# EAGLE board 484 1.1 (EAGLE 7.6.0)
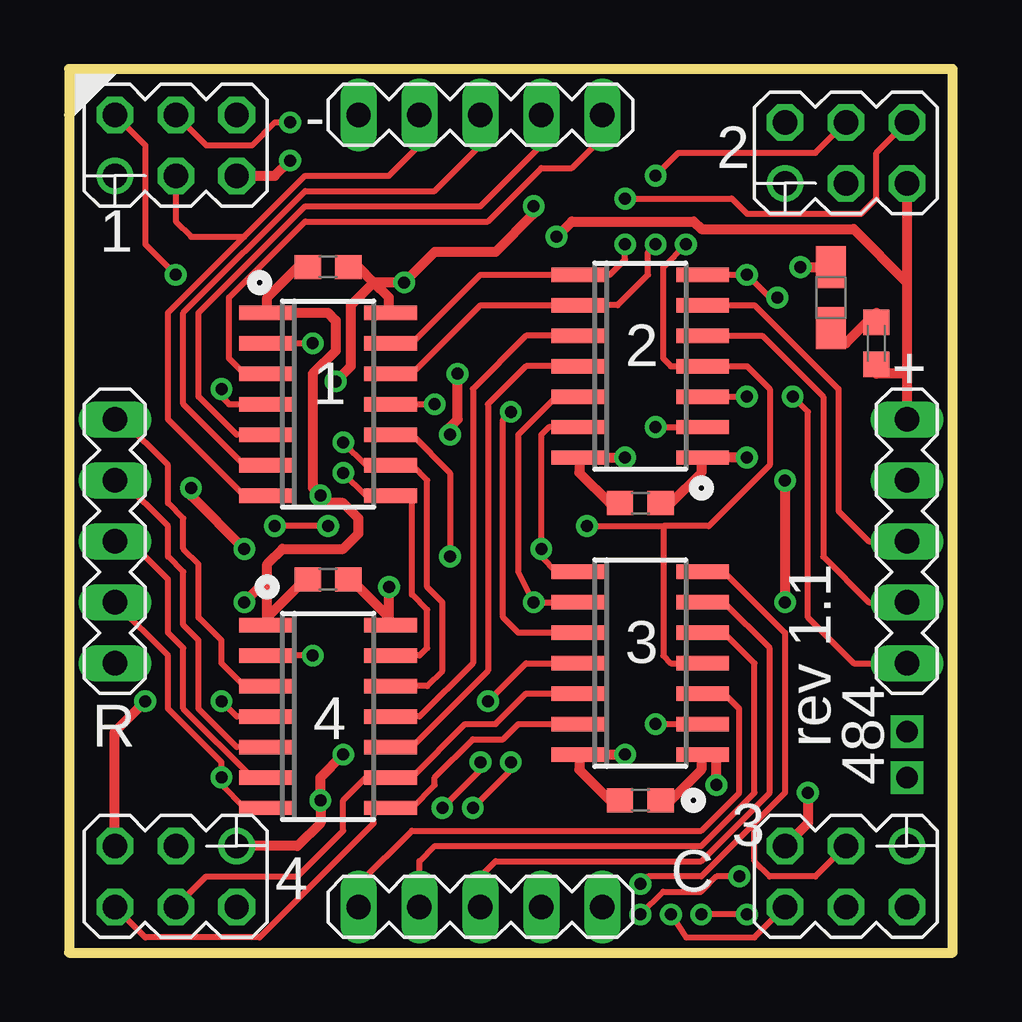
[diagram p0: board, top side]
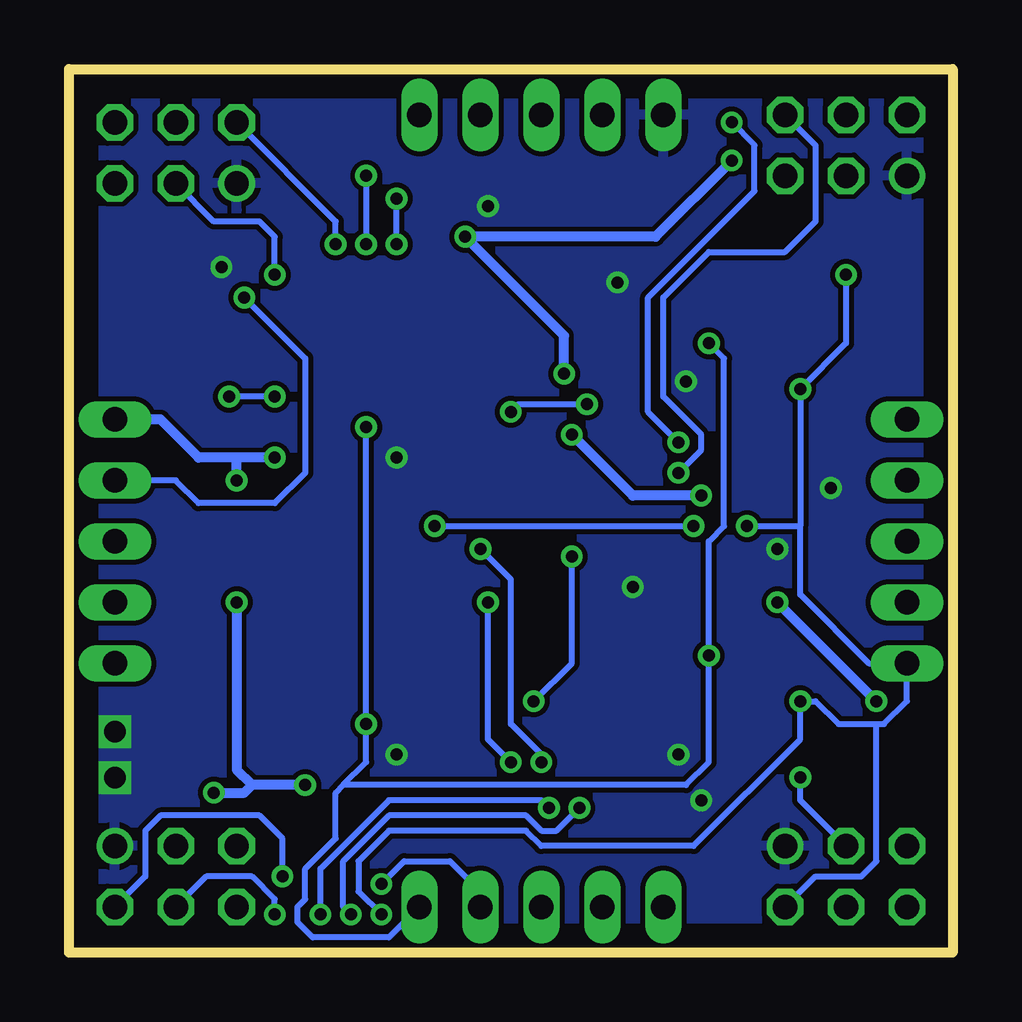
[diagram p1: board, bottom side, seen from below]

Size 36.83 x 36.83 mm. Coordinates in mm from the lower left corner, seen from the top.
Outline: 0,0 36.83,0 36.83,36.83 0,36.83 0,0
Copper layers (1*16): Top 0.035mm / dielectric 1.5mm / Bottom 0.035mm
Design rules "default": minimum track width 10mil, minimum drill 24mil, track to track 8mil, track to pad 8mil, pad to pad 8mil, via to via 8mil, smd to smd 8mil, copper to edge 40mil, drill to drill 8mil, minimum pad ring 10mil, minimum via ring 8mil, stop-mask expansion 4mil, vias tented up to drill 0mil, thermal gap 10mil

## Footprints (pad centres in the part's own frame; a part is rotated, then mirrored left to right if it is on the bottom)
SO14 = smd 0.6 x 2.2: 1 -3.81,-2.6; 2 -2.54,-2.6; 3 -1.27,-2.6; 4 0,-2.6; 5 1.27,-2.6; 6 2.54,-2.6; 7 3.81,-2.6; 8 3.81,2.6; 9 2.54,2.6; 10 1.27,2.6; 11 0,2.6; 12 -1.27,2.6; 13 -2.54,2.6; 14 -3.81,2.6
MA05-1 = drill 1.016 long: 2 -2.54,0; 3 0,0; 4 2.54,0; 5 5.08,0; GND -5.08,0
MA03-2 = drill 1.016 octagon: 2 -2.54,1.27; 3 0,-1.27; 4 0,1.27; 5 2.54,-1.27; 6 2.54,1.27 | drill 1.016: GND -2.54,-1.27
C1608 = smd 1.1 x 1: 1 -0.85,0; 2 0.85,0
C0603K = smd 1.05 x 1.08: 1 -0.875,0; 2 0.875,0
R/2012-12W = smd 1.75 x 1.26: + 1.275,0; - -1.275,0

## Placement (x,y rotation side)
E$1  [SO14]  10.8,22.86 270 top
E$2  [SO14]  23.81,24.45 270 top
E$3  [SO14]  10.8,9.84 270 top
E$4  [SO14]  23.81,12.07 270 top
E$6  [MA05-1]  17.14,1.91 0 top
E$7  [MA03-2]  32.39,33.34 0 top
E$8  [MA05-1]  17.14,34.92 180 top
E$9  [MA05-1]  34.92,17.14 270 top
E$10  [C1608]  10.8,15.56 0 top
E$11  [C1608]  10.8,28.57 0 top
E$12  [C1608]  23.81,18.73 0 top
E$13  [C1608]  23.81,6.35 0 top
E$14  [MA03-2]  4.45,3.18 180 top
E$15  [MA03-2]  32.39,3.18 180 top
E$17  [MA03-2]  4.45,33.66 0 top
E$18  [C0603K]  33.66,25.4 90 top
E$19  [R/2012-12W]  31.75,27.31 90 top
E$20  [MA05-1]  1.91,17.14 90 top

## Library data of the parts
E$1-E$4 = analog-devices
E$6-E$9 E$14 E$15 E$17 E$20 = con-lstb
E$10-E$13 = eagle-ltspice
E$18 E$19 = resistor

## Nets
GND: E$7.GND E$8.5 E$14.GND E$15.GND E$17.GND
S$2: E$14.6
S$3: E$9.4
S$8: E$8.4 E$17.3
S$15: E$14.2
S$16: E$17.4
S$17: E$9.GND E$14.5 E$15.5 E$17.5
S$19: E$17.6
S$20: E$9.3
S$23: E$6.GND
S$25: E$15.2 E$17.2 E$20.GND
S$26: E$7.6
S$27: E$6.3
S$29: E$14.4
S$30: E$8.GND
S$31: E$8.2
S$32: E$8.3
S$33: E$15.4
S$34: E$9.5
S$35: E$20.5
S$36: E$15.6
S$37: E$20.4
S$38: E$20.3
S$39: E$6.4 E$15.3
S$40: E$7.3 E$9.2
S$41: E$14.3 E$20.2
S$42: E$6.5
S$43: E$6.2
S$46: E$7.2

## Tracks (layer width: path | path; a pad name or v marks a point on that pad's centre or on a via)
GND  (via drill 0.5, 0.9)
  Top 0.406: v30.48,28.57 31.75,28.57 | 21.91,20.64 v23.18,20.64 | 21.91,8.25 v23.18,8.25 | v11.11,23.81 11.75,24.45 11.75,26.99 12.7,27.94 | 13.34,26.67 13.34,27.31 12.7,27.94 | 12.7,27.94 12.06,28.57 | 12.7,27.94 v13.97,27.94 15.24,29.21 17.78,29.21 19.37,30.8 v19.37,31.11 | v5.08,19.37 5.08,19.05 v7.3,16.83 | v11.43,8.25 10.48,7.3 v10.48,6.35 10.48,5.4 9.52,4.45 E$14.GND | 13.34,13.65 13.34,13.97 | 13.34,13.97 12.06,15.24 | 13.34,13.97 v13.34,15.24
  other vias: 34.92,9.21 34.92,7.3
  pour Bottom: 0,0 36.83,0 36.83,36.83 0,36.83
S$1
  Top 0.254: 13.97,12.38 14.6,12.38 14.92,12.7 14.92,14.29 14.29,14.92 14.29,19.05
S$2
  Top 0.254: 12.7,5.71 12.7,5.4 7.94,0.64 3.17,0.64 E$14.6
S$3
  Top 0.254: 26.99,25.72 28.89,25.72 31.43,23.18 31.43,16.51 33.34,14.61 E$9.4
S$4  (via drill 0.5)
  Top 0.254: 20.32,13.33 18.73,13.33 18.1,13.97 18.1,22.22 v18.41,22.54 | 13.97,22.86 v15.24,22.86
  Bottom 0.254: v18.41,22.54 18.1,22.86 v15.24,22.86
S$5
  Top 0.406: 21.27,20.64 21.27,20 22.54,18.73
S$6
  Top 0.406: 26.35,20.64 26.35,20 25.08,18.73
S$7
  Top 0.406: 26.35,8.25 26.35,7.62 25.08,6.35
S$8
  Top 0.254: E$17.3 4.45,30.48 5.08,29.85 7.3,29.85 | 7.62,19.05 7.3,19.05 4.13,22.22 4.13,26.67 7.3,29.85 | 7.3,29.85 9.84,32.39 13.34,32.39 14.6,33.66 E$8.4
S$9
  Top 0.254: 20.32,28.26 17.14,28.26 14.29,25.4 13.97,25.4
S$10
  Top 0.254: 14.29,24.13 17.14,26.99 20.32,26.99
S$11
  Top 0.254: 14.29,7.3 16.51,9.53 17.78,9.53 19.05,10.79 20.32,10.79
S$12
  Top 0.254: 14.29,6.03 15.24,6.99 15.24,7.3 16.83,8.89 18.1,8.89 18.73,9.53 20.32,9.53
S$13
  Top 0.254: 20.32,24.45 19.05,24.45 17.46,22.86 17.46,11.75 14.29,8.57 13.97,8.57
S$14
  Top 0.254: 20.32,25.72 19.05,25.72 16.83,23.5 16.83,12.07 14.6,9.84 13.97,9.84
S$15
  Bottom 0.254: E$14.2 5.71,3.18 3.81,3.18 3.17,3.81 3.17,9.53
S$16  (via drill 0.5)
  Top 0.254: E$17.4 5.71,33.66 7.62,33.66 8.57,34.61 v9.21,34.61 | 12.38,20.32 v11.43,21.27
  Bottom 0.254: v11.43,21.27 12.7,22.54 12.7,27.31 8.25,31.75 8.25,33.66 v9.21,34.61
S$17  (via drill 0.5)
  Top 0.406: v30.8,6.67 30.8,5.4 E$15.5 | E$14.5 1.91,9.21 v3.17,10.48 | 8.25,13.65 8.25,13.97 | 8.25,13.97 9.52,15.24 | 8.25,13.97 8.25,15.56 | 8.25,15.56 8.25,16.19 8.89,16.83 11.43,16.83 12.06,17.46 12.06,18.1 11.43,18.73 10.8,18.73 v10.48,19.05 10.16,19.37 10.16,24.13 11.11,25.08 11.11,26.35 10.8,26.67 9.21,26.67 | v7.3,14.61 8.25,15.56 | v15.88,21.59 15.88,21.91 16.19,22.22 v16.19,24.13 | v20.32,29.85 20.95,30.48 26.03,30.48 26.35,30.16 32.7,30.16 34.92,27.94 | 34.92,32.07 34.92,27.94 | 34.92,27.94 34.92,24.13 | 34.92,24.13 33.66,24.13 | 34.92,24.13 E$9.GND | v28.26,20.64 26.99,20.64 | v29.84,19.68 v29.84,14.61 | v26.99,6.99 26.99,8.25 | E$17.5 8.57,32.39 v9.21,33.02
  Bottom 0.406: v3.17,10.48 v7.3,14.61 | v10.48,19.05 13.34,19.05 v15.88,21.59 | v9.21,33.02 12.38,29.85 v20.32,29.85 16.19,25.72 v16.19,24.13 | E$9.GND 33.02,22.22 31.43,20.64 29.84,20.64 | v28.26,20.64 29.84,20.64 | v29.84,19.68 29.84,20.64 | v29.84,14.61 29.84,7.62 29.21,6.99 | v26.99,6.99 29.21,6.99 | v30.8,6.67 29.53,6.67 29.21,6.99
S$18
  Top 0.254: 13.97,11.11 14.92,11.11 15.56,11.75 15.56,14.61 14.92,15.24 14.92,19.68 14.29,20.32 13.97,20.32
S$19  (via drill 0.5)
  Top 0.254: 12.38,19.05 v11.43,20
  Bottom 0.254: v11.43,20 10.48,20.96 10.48,21.59 12.06,23.18 12.06,27.31 10.16,29.21 6.98,29.21 5.71,30.48 5.71,33.66 E$17.6
S$20
  Top 0.254: 26.99,26.99 28.57,26.99 32.07,23.5 32.07,18.42 33.34,17.14 E$9.3
S$21  (via drill 0.5)
  Top 0.254: 20.32,12.07 19.05,12.07 v17.46,10.48 | 13.97,21.59 14.29,21.59 15.88,20 v15.88,16.51
  Bottom 0.254: v17.46,10.48 15.88,12.07 v15.88,16.51
S$22
  Top 0.406: 33.66,26.67 32.39,25.4 31.75,25.4
S$23
  Top 0.254: 26.99,10.79 27.3,10.79 27.94,10.16 27.94,6.67 26.35,5.08 14.29,5.08 12.06,2.86 E$6.GND
S$24
  Top 0.406: 21.27,8.25 21.27,7.62 22.54,6.35
S$25  (via drill 0.5)
  Top 0.254: E$17.2 3.17,33.66 3.17,29.53 v4.45,28.26 | v27.94,3.18 26.99,3.18 26.35,2.54 24.77,2.54 v23.81,1.59 | 7.3,9.84 6.98,9.84 v6.35,10.48 | 26.99,24.45 28.26,24.45 29.21,23.5 29.21,20.32 26.67,17.78 24.77,17.78 | 25.72,12.07 25.08,12.07 24.77,12.38 24.77,17.78 | v21.59,17.78 24.77,17.78 | v10.8,17.78 v8.57,17.78 | v6.35,23.5 6.35,23.18 6.67,22.86 7.3,22.86
  Bottom 0.254: E$15.2 33.66,3.18 33.66,5.08 33.02,5.71 28.89,5.71 27.94,4.76 v27.94,3.18 | v23.81,1.59 24.77,2.54 24.77,3.81 23.49,5.08 17.78,5.08 17.14,4.45 10.8,4.45 6.35,8.89 v6.35,10.48 5.71,10.48 4.76,9.53 2.86,9.53 1.91,10.48 E$20.GND 3.49,12.07 6.35,14.92 6.35,17.78 | v21.59,17.78 v10.8,17.78 | 6.35,17.78 v6.35,23.5 4.45,25.4 v4.45,28.26 | v8.57,17.78 6.35,17.78
S$26  (via drill 0.5)
  Top 0.254: 22.23,28.26 22.54,28.26 23.18,28.89 v23.18,29.53 | v23.18,31.43 27.62,31.43 28.26,30.8 33.02,30.8 33.66,31.43 33.66,33.34 E$7.6
  Bottom 0.254: v23.18,29.53 v23.18,31.43
S$27
  Top 0.254: E$6.3 17.14,3.18 17.78,3.81 26.35,3.81 29.21,6.67 29.21,12.7 27.3,14.61 26.99,14.61
S$29
  Top 0.254: E$14.4 5.71,3.18 9.52,3.18 11.43,5.08 11.43,6.35 12.38,7.3
S$30
  Top 0.254: 7.3,24.13 6.67,24.77 6.67,27.31 9.84,30.48 17.46,30.48 19.69,32.7 20.95,32.7 22.23,33.97 E$8.GND
S$31
  Top 0.254: 7.62,21.59 6.98,21.59 5.4,23.18 5.4,26.67 9.84,31.11 17.14,31.11 19.69,33.66 E$8.2
S$32
  Top 0.254: 7.62,20.32 7.3,20.32 4.76,22.86 4.76,26.67 9.84,31.75 15.24,31.75 17.14,33.66 E$8.3
S$33  (via drill 0.5)
  Top 0.254: v28.26,1.59 v26.35,1.59 | 20.32,23.18 18.73,21.59 18.73,15.88 v19.37,14.61 20.64,14.61 | v16.83,6.03 18.41,7.62 v18.41,7.94
  Bottom 0.254: v26.35,1.59 26.35,3.49 23.49,6.35 17.14,6.35 v16.83,6.03 | v18.41,7.94 19.37,8.89 v19.37,14.61 | v28.26,1.59 28.26,2.22 29.21,3.18 31.11,3.18 E$15.4
S$34  (via drill 0.5)
  Top 0.254: E$9.5 32.7,12.07 30.8,13.97 30.8,22.54 v30.16,23.18 | 27.3,23.18 v28.26,23.18
  Bottom 0.254: v28.26,23.18 v30.16,23.18
S$35
  Top 0.254: 7.3,11.11 6.35,12.07 6.35,13.02 5.4,13.97 5.4,16.19 4.76,16.83 4.76,18.1 4.13,18.73 4.13,20.32 2.22,22.22 E$20.5
S$36  (via drill 0.5)
  Top 0.254: v25.08,1.59 25.72,0.64 28.57,0.64 E$15.6 | 20.32,21.91 20,21.91 19.69,21.59 v19.69,16.83 19.69,16.51 20.32,15.88 | v15.56,6.03 17.14,7.62 v17.14,7.94
  Bottom 0.254: v25.08,1.59 25.4,1.91 25.4,3.81 23.49,5.71 17.78,5.71 17.14,5.08 16.51,5.08 v15.56,6.03 | v19.69,16.83 18.41,15.56 18.41,9.53 17.14,8.25 v17.14,7.94
S$37
  Top 0.254: 7.62,8.57 6.98,8.57 5.4,10.16 5.4,13.02 4.76,13.65 4.76,15.88 4.13,16.51 4.13,17.78 2.22,19.68 E$20.4
S$38
  Top 0.254: 7.62,7.3 4.76,10.16 4.76,12.7 4.13,13.33 4.13,15.56 2.54,17.14 E$20.3
S$39  (via drill 0.5)
  Top 0.254: E$15.3 31.11,3.18 29.21,3.18 28.57,3.81 28.57,5.4 | 28.57,5.4 29.84,6.67 29.84,13.33 27.3,15.88 26.99,15.88 | 28.57,5.4 26.35,3.18 24.13,3.18 v23.81,2.86
  Bottom 0.254: v23.81,2.86 22.86,3.81 20.95,3.81 19.69,2.54 E$6.4
S$40  (via drill 0.5)
  Top 0.254: 26.99,28.26 v28.26,28.26 29.21,27.31 v29.53,27.31
  Bottom 0.254: E$9.2 32.39,19.68 31.43,18.73 28.26,18.73 26.99,20 26.99,24.77 v29.53,27.31 | v28.26,28.26 28.26,29.85 28.89,30.48 30.8,30.48 E$7.3
S$41  (via drill 0.5)
  Top 0.254: 7.3,6.03 6.35,6.99 v6.35,7.3 6.35,7.94 4.13,10.16 4.13,12.38 E$20.2
  Bottom 0.254: v6.35,7.3 6.35,6.35 E$14.3
S$42  (via drill 0.5)
  Top 0.254: 8.89,25.4 v10.16,25.4 | v10.16,12.38 8.89,12.38 | v24.45,21.91 25.72,21.91 | v24.45,9.53 25.72,9.53
  Bottom 0.254: E$6.5 23.49,0.64 26.67,0.64 27.3,1.27 27.3,1.91 26.99,2.22 26.99,3.49 25.72,4.76 25.72,6.67 25.4,6.99 | v10.16,25.4 9.52,24.77 9.52,17.78 10.16,17.14 v10.16,12.38 10.16,7.94 11.11,6.99 25.4,6.99 | v24.45,21.91 v24.45,9.53 24.45,7.94 25.4,6.99
S$43
  Top 0.254: E$6.2 14.6,3.81 15.24,4.45 26.35,4.45 28.57,6.67 28.57,12.07 27.3,13.33 26.99,13.33
S$45  (via drill 0.5)
  Top 0.254: 21.91,26.99 22.86,26.99 24.13,28.26 24.13,29.21 v24.45,29.53 | v24.45,32.39 25.4,33.34 31.11,33.34 32.39,34.61
  Bottom 0.254: v24.45,32.39 v24.45,29.53
S$46  (via drill 0.5)
  Top 0.254: 25.72,24.45 25.08,24.45 24.77,24.77 24.77,28.57 v25.72,29.53
  Bottom 0.254: v25.72,29.53 25.72,30.48 E$7.2
S$47
  Top 0.406: 9.52,28.57 8.25,27.31 8.25,26.67

## Text on the board
tPlace: - | 2 | 1 | 2 | + | 1 | 3 | R | 4 | rev 1.1 | 484 | 3 | 4 | C